# EAGLE board bot_backup (EAGLE 9.6.0)

Size 122.11 x 96.19 mm. Coordinates in mm from the lower left corner, seen from the top.
Outline: 0,92.44 0,4.34 arc90 4.34,0 118.87,0 arc90 121.9,3.03 121.9,91.2 arc90 119.45,96.19 3.75,96.19 arc90 0,92.44
Copper layers (1*16): Top 0.035mm / dielectric 1.5mm / Bottom 0.035mm
Design rules "default *": minimum track width 24mil, minimum drill 20mil, track to track 20mil, track to pad 20mil, pad to pad 20mil, via to via 20mil, smd to smd 0mil, copper to edge 0.2mm, drill to drill 0.2mm, minimum pad ring 10mil, minimum via ring 8mil, stop-mask expansion 4mil, vias tented up to drill 0mil, thermal gap 10mil
Holes 2.95 mm at 3.81,3.81 119.3,93.01 119.38,3.81 10.16,91.92

## Footprints (pad centres in the part's own frame; a part is rotated, then mirrored left to right if it is on the bottom)
C025-025X050 = drill 0.813 octagon: 1 -1.27,0; 2 1.27,0
TO220H = drill 1.118 long: 1 -2.54,-10.16; 2 0,-10.16; 3 2.54,-10.16 | hole 3.302: 0,4.826
1X02 = drill 1.016 long: 1 -1.27,0; 2 1.27,0
1X02_XTRA_BIG = drill 2.057 pad 3.556: 1 -2.54,0; 2 2.54,0
LED5MM = drill 0.813 octagon: A -1.27,0; K 1.27,0
RASPI_BOARD_B+_FULL = drill 1 pad 1.778 square: 1 8.37,51.23 | drill 1 pad 1.778: 2 8.37,53.77; 3 10.91,51.23; 4 10.91,53.77; 5 13.45,51.23; 6 13.45,53.77; 7 15.99,51.23; 8 15.99,53.77; 9 18.53,51.23; 10 18.53,53.77; 11 21.07,51.23; 12 21.07,53.77; 13 23.61,51.23; 14 23.61,53.77; 15 26.15,51.23; 16 26.15,53.77; 17 28.69,51.23; 18 28.69,53.77; 19 31.23,51.23; 20 31.23,53.77; 21 33.77,51.23; 22 33.77,53.77; 23 36.31,51.23; 24 36.31,53.77; 25 38.85,51.23; 26 38.85,53.77; 27 41.39,51.23; 28 41.39,53.77; 29 43.93,51.23; 30 43.93,53.77; 31 46.47,51.23; 32 46.47,53.77; 33 49.01,51.23; 34 49.01,53.77; 35 51.55,51.23; 36 51.55,53.77; 37 54.09,51.23; 38 54.09,53.77; 39 56.63,51.23; 40 56.63,53.77 | hole 2.75: 3.5,3.5; 3.5,52.5; 61.5,3.5; 61.5,52.5
0207/10 = drill 0.813 octagon: 1 -5.08,0; 2 5.08,0
1X10 = drill 1.016 long: 1 -11.43,0; 2 -8.89,0; 3 -6.35,0; 4 -3.81,0; 5 -1.27,0; 6 1.27,0; 7 3.81,0; 8 6.35,0; 9 8.89,0; 10 11.43,0
DUEMILANOVE_SHIELD = drill 1.016 pad 1.88: 3.3V 50.8,26.67; 5V 50.8,29.21; A0 50.8,41.91; A1 50.8,44.45; A2 50.8,46.99; A3 50.8,49.53; A4 50.8,52.07; A5 50.8,54.61; AREF 2.54,15.24; D2 2.54,49.53; D3 2.54,46.99; D4 2.54,44.45; D5 2.54,41.91; D6 2.54,39.37; D7 2.54,36.83; D8 2.54,33.02; D9 2.54,30.48; D10 2.54,27.94; D11 2.54,25.4; D12 2.54,22.86; D13 2.54,20.32; GND@0 50.8,31.75; GND@1 50.8,34.29; GND@2 2.54,17.78; RES 50.8,24.13; RX 2.54,54.61; TX 2.54,52.07; VIN 50.8,36.83 | hole 3.302: 45.72,57.15; 2.54,6.35
ULTRASONIC-HC-SR04#V = drill 1 square: 1 -3.81,0 | drill 1: 2 -1.27,0; 3 1.27,0; 4 3.81,0

## Placement (x,y rotation side)
C1  330n  [C025-025X050]  83.82,85.09 0 top
C2  100n  [C025-025X050]  83.82,91.44 0 top
IC1  7805T  [TO220H]  35.23,19.28 0 top
JP2  [1X02]  7.09,9.35 0 top
JP7  SHIELD_PWR  [1X02_XTRA_BIG]  6.81,19.94 270 top
LED1  [LED5MM]  102.87,88.9 0 top
LED2  [LED5MM]  102.87,78.74 0 top
PI  RASPI_BOARD_B+_F  [RASPI_BOARD_B+_FULL]  1.27,30.48 90 bottom
R1  1k  [0207/10]  69.85,91.44 0 top
R2  1k  [0207/10]  69.86,76.83 0 top
R3  2k  [0207/10]  69.85,87.63 0 top
R4  2k  [0207/10]  69.85,83.82 0 top
R5  10  [0207/10]  69.85,80.01 0 top
TXS0108E1:JP1  [1X10]  76.2,72.39 0 top
TXS0108E1:JP2  [1X10]  76.2,59.69 180 top
U3  ARDUINO_SHIELDLABEL  [DUEMILANOVE_SHIELD]  120.65,2.54 90 top
U$1  ULTRASONIC-HC-SR04#V  [ULTRASONIC-HC-SR04#V]  116.84,85.09 270 top
U$2  ULTRASONIC-HC-SR04#V  [ULTRASONIC-HC-SR04#V]  116.84,66.04 90 top

## Library data of the parts
C1 C2 = rcl; SPICEPREFIX: C
IC1 = linear
JP2 TXS0108E1:JP1 TXS0108E1:JP2 = pinhead
JP7 U3 = SparkFun
LED1 LED2 = led
PI = raspberrypi_bastelstube_v13
R1-R5 = resistor
U$1 U$2 = diy-modules

## Nets
0: C1.2 C2.2 IC1.2 JP2.1 JP7.2 PI.6 R3.2 R4.2 R5.1 TXS0108E1:JP2.1 U3.GND@0 U3.GND@1 U3.GND@2 U$1.4 U$2.4
L_BCK: PI.40 TXS0108E1:JP1.7
L_FWD: PI.38 TXS0108E1:JP1.6
L_SPD: PI.32 U3.D5
L_US_ECHO: PI.18 R1.1 R3.1
L_US_TRIG: PI.16 U$1.2
N$1: R1.2 U$1.3
N$2: R2.2 U$2.3
N$5: LED1.K LED2.K R5.2
N$13: TXS0108E1:JP2.8 U3.D4
N$14: TXS0108E1:JP2.5 U3.D7
N$15: TXS0108E1:JP2.4 U3.D8
N$16: TXS0108E1:JP2.3 U3.D9
PI_3V3: PI.1 TXS0108E1:JP1.1 TXS0108E1:JP1.10
PI_5V: C2.1 IC1.3 PI.2 TXS0108E1:JP2.10 U3.5V U3.A0 U3.A1 U$1.1 U$2.1
PWR+: C1.1 IC1.1 JP2.2 JP7.1 LED1.A LED2.A
R_BCK: PI.31 TXS0108E1:JP1.8
R_FWD: PI.29 TXS0108E1:JP1.3
R_SPD: PI.33 U3.D6
R_US_ECHO: PI.15 R2.1 R4.1
R_US_TRIG: PI.13 U$2.2
TXS0108E1:A1: TXS0108E1:JP1.2
TXS0108E1:A3: TXS0108E1:JP1.4
TXS0108E1:A4: TXS0108E1:JP1.5
TXS0108E1:A8: TXS0108E1:JP1.9
TXS0108E1:B1: TXS0108E1:JP2.9
TXS0108E1:B3: TXS0108E1:JP2.7
TXS0108E1:B4: TXS0108E1:JP2.6
TXS0108E1:B8: TXS0108E1:JP2.2

## Tracks (layer width: path | path; a pad name or v marks a point on that pad's centre or on a via)
0  (14 unrouted)
L_BCK  (1 unrouted)
L_FWD  (1 unrouted)
L_SPD  (1 unrouted)
L_US_ECHO  (2 unrouted)
L_US_TRIG  (1 unrouted)
N$1  (1 unrouted)
N$2  (1 unrouted)
N$5  (2 unrouted)
N$13  (1 unrouted)
N$14  (1 unrouted)
N$15  (1 unrouted)
N$16  (1 unrouted)
PI_3V3  (2 unrouted)
PI_5V  (8 unrouted)
PWR+  (5 unrouted)
R_BCK  (1 unrouted)
R_FWD  (1 unrouted)
R_SPD  (1 unrouted)
R_US_ECHO  (2 unrouted)
R_US_TRIG  (1 unrouted)
(copper drawn outside any net)
  shapes: Top area x2